# EAGLE board shield (EAGLE 6.5.0)
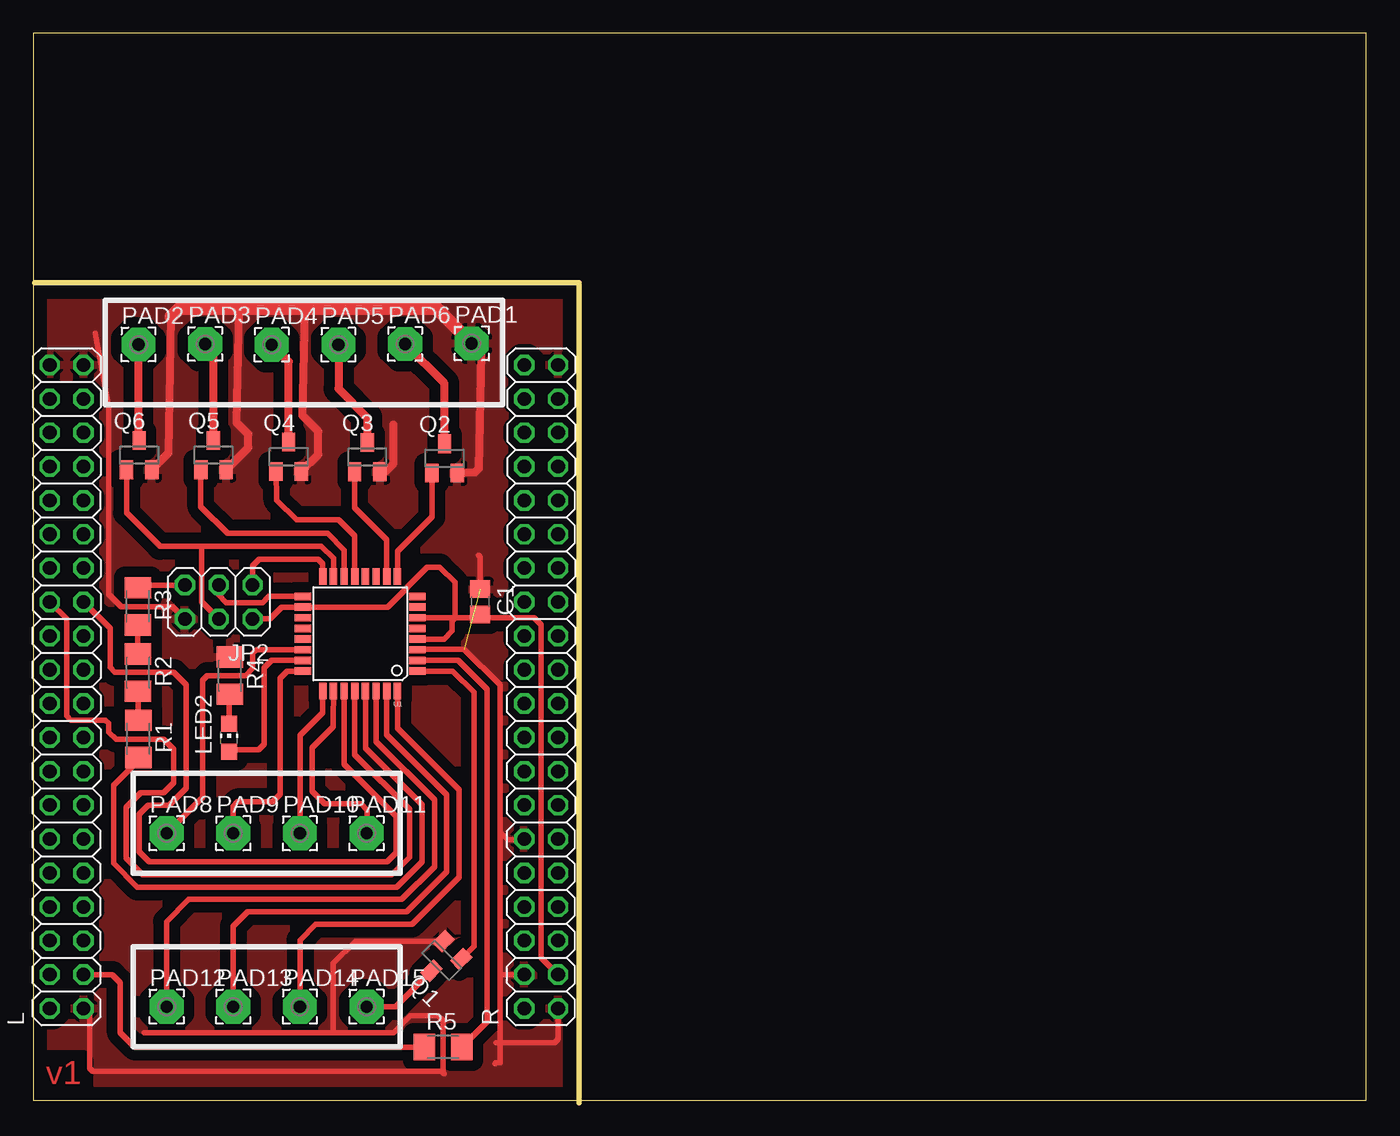
[diagram p0: board, top side]

Size 100 x 80.19 mm. Coordinates in mm from the lower left corner, seen from the top.
Outline: 0.09,61.48 40.96,61.48 40.96,0
Outline: 0,0.19 100,0.19 100,80.19 0,80.19 0,0.19
Copper layers (1*16): Top 0.035mm / dielectric 1.5mm / Bottom 0.035mm
Design rules "default *": minimum track width 10mil, minimum drill 24mil, track to track 20mil, track to pad 20mil, pad to pad 20mil, via to via 20mil, smd to smd 20mil, copper to edge 40mil, drill to drill 8mil, minimum pad ring 10mil, minimum via ring 8mil, stop-mask expansion 4mil, vias tented up to drill 0mil, thermal gap 10mil
tRestrict: area 21.4,31.8 to 27.8,36.5

## Footprints (pad centres in the part's own frame; a part is rotated, then mirrored left to right if it is on the bottom)
C0805 = smd 1.3 x 1.5: 1 -0.95,0; 2 0.95,0
2X03 = drill 1.016 octagon: 1 -2.54,-1.27; 2 -2.54,1.27; 3 0,-1.27; 4 0,1.27; 5 2.54,-1.27; 6 2.54,1.27
2X20 = drill 1.016 octagon: 1 -24.13,-1.27; 2 -24.13,1.27; 3 -21.59,-1.27; 4 -21.59,1.27; 5 -19.05,-1.27; 6 -19.05,1.27; 7 -16.51,-1.27; 8 -16.51,1.27; 9 -13.97,-1.27; 10 -13.97,1.27; 11 -11.43,-1.27; 12 -11.43,1.27; 13 -8.89,-1.27; 14 -8.89,1.27; 15 -6.35,-1.27; 16 -6.35,1.27; 17 -3.81,-1.27; 18 -3.81,1.27; 19 -1.27,-1.27; 20 -1.27,1.27; 21 1.27,-1.27; 22 1.27,1.27; 23 3.81,-1.27; 24 3.81,1.27; 25 6.35,-1.27; 26 6.35,1.27; 27 8.89,-1.27; 28 8.89,1.27; 29 11.43,-1.27; 30 11.43,1.27; 31 13.97,-1.27; 32 13.97,1.27; 33 16.51,-1.27; 34 16.51,1.27; 35 19.05,-1.27; 36 19.05,1.27; 37 21.59,-1.27; 38 21.59,1.27; 39 24.13,-1.27; 40 24.13,1.27
CHIP-LED0805 = smd 1.2 x 1.2: A 0,-1.05; C 0,1.05
2,54/0,9 = drill 0.914 pad 2.54 octagon: 1 0,0
SOT23 = smd 1 x 1.4: 1 -0.95,-1.1; 2 0.95,-1.1; 3 0,1.1
M1206 = smd 1.6 x 2: 1 -1.4,0; 2 1.4,0
TQFP32-08 = smd 1.27 x 0.559: 1 -4.293,2.8; 2 -4.293,2; 3 -4.293,1.2; 4 -4.293,0.4; 5 -4.293,-0.4; 6 -4.293,-1.2; 7 -4.293,-2; 8 -4.293,-2.8; 17 4.293,-2.8; 18 4.293,-2; 19 4.293,-1.2; 20 4.293,-0.4; 21 4.293,0.4; 22 4.293,1.2; 23 4.293,2; 24 4.293,2.8 | smd 0.559 x 1.27: 9 -2.8,-4.293; 10 -2,-4.293; 11 -1.2,-4.293; 12 -0.4,-4.293; 13 0.4,-4.293; 14 1.2,-4.293; 15 2,-4.293; 16 2.8,-4.293; 25 2.8,4.293; 26 2,4.293; 27 1.2,4.293; 28 0.4,4.293; 29 -0.4,4.293; 30 -1.2,4.293; 31 -2,4.293; 32 -2.8,4.293

## Placement (x,y rotation side)
C1  [C0805]  33.53,37.56 270 top
JP2  [2X03]  13.91,37.54 180 top
L  [2X20]  2.5,31.19 90 top
LED2  [CHIP-LED0805]  14.68,27.37 0 top
PAD1  [2,54/0,9]  32.89,56.93 0 top
PAD2  [2,54/0,9]  7.89,56.85 0 top
PAD3  [2,54/0,9]  12.89,56.89 0 top
PAD4  [2,54/0,9]  17.89,56.83 0 top
PAD5  [2,54/0,9]  22.89,56.83 0 top
PAD6  [2,54/0,9]  27.89,56.89 0 top
PAD8  [2,54/0,9]  10,20.19 0 top
PAD9  [2,54/0,9]  15,20.19 0 top
PAD10  [2,54/0,9]  20,20.19 0 top
PAD11  [2,54/0,9]  25,20.19 0 top
PAD12  [2,54/0,9]  10,7.19 0 top
PAD13  [2,54/0,9]  15,7.19 0 top
PAD14  [2,54/0,9]  20,7.19 0 top
PAD15  [2,54/0,9]  25,7.19 0 top
Q1  PMV20EN  [SOT23]  30.65,10.66 135 top
Q2  PMV20EN  [SOT23]  30.85,48.31 0 top
Q3  PMV20EN  [SOT23]  25.06,48.41 0 top
Q4  PMV20EN  [SOT23]  19.16,48.43 0 top
Q5  PMV20EN  [SOT23]  13.52,48.56 0 top
Q6  PMV20EN  [SOT23]  7.94,48.56 0 top
R  [2X20]  38.1,31.19 90 top
R1  [M1206]  7.88,27.27 270 top
R2  [M1206]  7.86,32.25 270 top
R3  [M1206]  7.84,37.21 270 top
R4  [M1206]  14.75,32.02 270 top
R5  [M1206]  30.74,4.16 0 top
U1  ATMEGA168  [TQFP32-08]  24.52,35.16 180 top

## Library data of the parts
C1 R1-R5 = rcl
JP2 L R = pinhead
LED2 = led
PAD1-PAD6 PAD8-PAD15 = wirepad
Q1-Q6 = adafruit
U1 = SparkFun-DigitalIC

## Nets
5V: C1.2 JP2.2 R.3 U1.4 U1.6 U1.18
GND: C1.1 JP2.6 L.1 L.39 L.40 PAD1.1 Q1.2 Q2.2 Q3.2 Q4.2 Q5.2 Q6.2 R4.1 R.1 R.4 R.12 R.39 U1.3
INT0: R5.2 U1.2
N$1: R1.2 U1.29
N$2: JP2.1 U1.16
N$3: JP2.3 U1.17
N$4: PAD15.1 Q1.3
N$5: PAD6.1 Q2.3
N$6: PAD5.1 Q3.3
N$7: PAD4.1 Q4.3
N$8: PAD3.1 Q5.3
N$9: PAD2.1 Q6.3
N$10: JP2.5 R3.1
N$11: PAD12.1 U1.30
N$12: PAD13.1 U1.31
N$13: PAD14.1 U1.32
N$14: PAD8.1 U1.22
N$15: PAD9.1 U1.24
N$16: PAD10.1 U1.25
N$17: PAD11.1 U1.26
N$18: R1.1 R2.2
N$19: R.14
N$20: R.40
N$21: R2.1 R3.2
N$22: L.2
N$23: LED2.C R4.2
N$24: R.2
N$25: L.3 R5.1
N$26: LED2.A U1.23
OC0_PWM1: Q2.1 U1.9
OC0_PWM2: Q3.1 U1.10
OC1_PWM1: Q4.1 U1.13
OC1_PWM2: Q5.1 U1.14
OC2_PWM1: Q1.1 U1.1
OC2_PWM2: JP2.4 Q6.1 U1.15
SCK: L.26 U1.28
SDA: L.25 U1.27

## Tracks (layer width: path | path; a pad name or v marks a point on that pad's centre or on a via)
5V
  Top 0.406: 30.25,34.76 U1.4 30.81,34.76 31.42,35.37 31.42,36.15 31.63,36.36 | JP2.2 17.75,36.27 18.64,37.16 U1.18 26.57,37.16 29.56,40.15 30.49,40.15 31.63,39.01 31.63,36.36 | 28.84,36.39 U1.6 31.63,36.36 | R.3 38.1,10.87 38.1,35.84 37.58,36.36 33.28,36.36 | 31.63,36.36 33.28,36.36 | 33.28,36.36 C1.2
GND  (1 unrouted)
  Top 0.406: 4.66,57.69 5.66,52.19 5.66,38.14 6.61,37.19 10.45,37.19 JP2.6 | U1.3 28.86,34.01 32.33,34.01 35.02,31.32 35.02,20.3 35.03,20.29 | 30.53,11.88 Q1.2 24.17,12.11 22.5,10.44 22.5,5.28 22.47,5.25 | R.12 36.79,19.72 35.6,19.72 35.03,20.29 | L.1 4.23,6.6 4.23,2.56 4.44,2.35 30.62,2.35 30.73,2.24 | 35.03,20.29 35.03,9.58 | 35.03,9.58 35.03,3.01 34.99,2.97 | R.1 39.37,4.74 39.1,4.47 34.72,4.47 | R.4 35.05,9.6 35.03,9.58 | 30.81,2.16 30.73,2.24 | 30.73,2.24 30.73,6.16 30.38,6.51 28.28,6.51 27.02,5.25 22.47,5.25 | 22.47,5.25 8.33,5.25 | 34.99,2.97 35.03,2.97 | 34.99,2.97 34.69,2.97 34.63,2.91 | C1.1 33.53,40.92 33.41,41.04
  Top 0.61: PAD1.1 33.6,56.22 33.41,47.54 33.12,47.25 31.84,47.25 Q2.2 | Q3.2 26.43,47.31 27.03,47.91 27.03,50.86 | Q4.2 21.38,48.6 21.38,50.34 20.2,51.52 20.39,59.47 20.28,59.58 | Q5.2 16.12,49.11 16.12,50.13 15.25,51 15.44,59.43 15.29,59.58 | Q6.2 10.15,48.72 10.34,58.95 | 25.49,59.45 25.36,59.58
  Top 1.016: 10.34,58.95 10.97,59.58 15.29,59.58 20.28,59.58 25.36,59.58 30.24,59.58 PAD1.1
  pour Top (isolate 0.813): 0.1,0.29 40.95,0.29 40.95,61.63 0.21,61.63 0.21,0.4
INT0
  Top 0.406: U1.2 31.87,33.16 34.03,31 34.03,6.05 R5.2
N$1
  Top 0.406: 24.91,30.86 U1.29 24.92,26.57 29.15,22.34 29.15,18.05 27.26,16.16 7.81,16.16 6.03,17.94 6.03,23.79 7.88,25.64 R1.2
N$2
  Top 0.406: U1.16 21.72,40.41 21.37,40.76 16.94,40.76 16.45,40.27 JP2.1
N$3
  Top 0.406: U1.17 17.66,37.96 17.19,37.49 14.47,37.49 13.89,38.07 13.89,38.79 JP2.3
N$4
  Top 0.406: Q1.3 27.18,7.19 PAD15.1
N$5
  Top 0.61: Q2.3 30.85,53.93 PAD6.1
N$6
  Top 0.61: PAD5.1 22.89,53.54 25.06,51.37 Q3.3
N$7
  Top 0.61: Q4.3 19.16,55.56 PAD4.1
N$8
  Top 0.61: Q5.3 13.52,56.26 PAD3.1
N$9
  Top 0.61: Q6.3 7.89,49.71 PAD2.1
N$10
  Top 0.406: JP2.5 8.32,38.81 8.12,38.61 R3.1
N$11
  Top 0.406: U1.30 25.72,27.07 30.09,22.7 30.09,17.69 27.63,15.23 11.66,15.23 10,13.57 PAD12.1
N$12
  Top 0.406: U1.31 26.52,27.59 31.02,23.09 31.02,17.31 28.02,14.31 16.08,14.31 15,13.23 PAD13.1
N$13
  Top 0.406: U1.32 27.32,28.08 31.94,23.46 31.94,16.91 28.41,13.38 21.19,13.38 20,12.19 PAD14.1
N$14
  Top 0.406: PAD8.1 12.72,22.91 12.72,31.69 13.05,32.02 15.92,32.02 16.47,32.57 16.47,33.68 16.75,33.96 U1.22
N$15
  Top 0.406: U1.24 19.03,32.36 18.51,31.84 18.51,23.12 17.94,22.55 15.31,22.55 14.99,22.23 PAD9.1
N$16
  Top 0.406: U1.25 21.72,29.25 20,27.53 PAD10.1
N$17
  Top 0.406: U1.26 22.51,28.61 22.51,28.2 20.93,26.62 20.93,23.33 21.86,22.4 24.6,22.4 25.06,21.94 25.06,20.25 PAD11.1
N$18
  Top 0.406: R1.1 7.86,28.69 R2.2
N$21
  Top 0.406: R2.1 7.84,33.67 R3.2
N$23
  Top 0.406: LED2.C 14.68,30.55 R4.2
N$25
  Top 0.406: R5.1 7.61,4.16 6.53,5.24 6.53,8.99 5.93,9.59 L.3
N$26
  Top 0.406: U1.23 17.89,33.16 17.33,32.6 17.33,26.87 16.92,26.46 14.82,26.46 LED2.A
OC0_PWM1
  Top 0.406: U1.9 27.32,41.35 29.9,43.93 Q2.1
OC0_PWM2
  Top 0.406: U1.10 26.52,42.2 24.11,44.61 Q3.1
OC1_PWM1
  Top 0.406: U1.13 24.12,42.5 22.91,43.71 19.74,43.71 18.27,45.18 Q4.1
OC1_PWM2
  Top 0.406: Q5.1 12.57,44.69 14.58,42.68 22.08,42.68 23.32,41.44 U1.14
OC2_PWM1
  Top 0.406: U1.1 31.47,32.36 33.07,30.76 33.07,11.74 Q1.1
OC2_PWM2
  Top 0.406: JP2.4 12.62,37.56 12.62,41.69 12.59,41.72 | Q6.1 6.99,44.23 9.5,41.72 12.59,41.72 | U1.15 22.52,40.81 21.61,41.72 12.59,41.72
SCK
  Top 0.406: L.26 2.49,36.28 2.49,31.16 2.5,31.15 2.5,29 2.82,28.68 5.41,28.68 5.66,28.43 5.66,27.79 6.2,27.25 9.78,27.25 10.52,26.51 10.52,23.98 9.78,23.24 8.07,23.24 6.96,22.13 6.96,18.33 8.22,17.07 26.89,17.07 28.23,18.41 28.23,21.98 24.12,26.09 U1.28
SDA
  Top 0.406: L.25 5.75,35.56 5.75,32.63 6.12,32.26 10.54,32.26 11.46,31.34 11.46,23.56 10.18,22.28 8.6,22.28 7.95,21.63 7.95,18.81 8.7,18.06 26.53,18.06 27.21,18.74 27.21,21.49 23.32,25.38 U1.27

## Text on the board
Top: v1